# Allegro board DATAHSS.brd
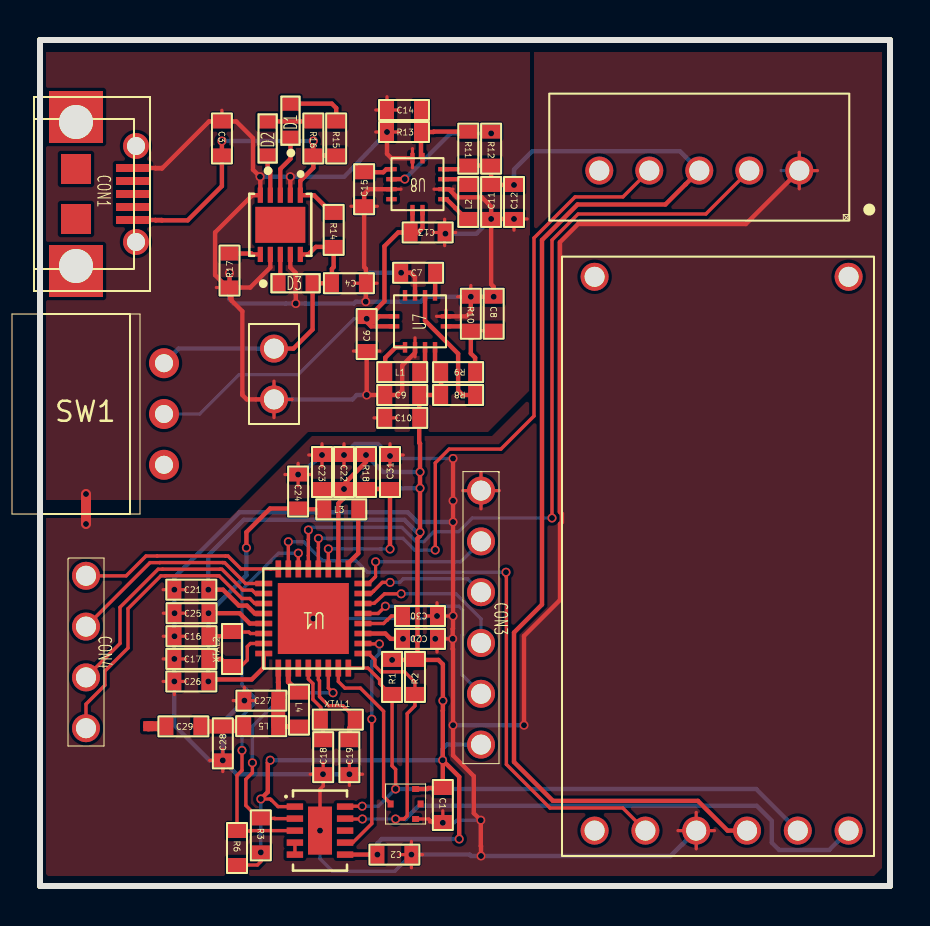
[diagram p0: board, top side]
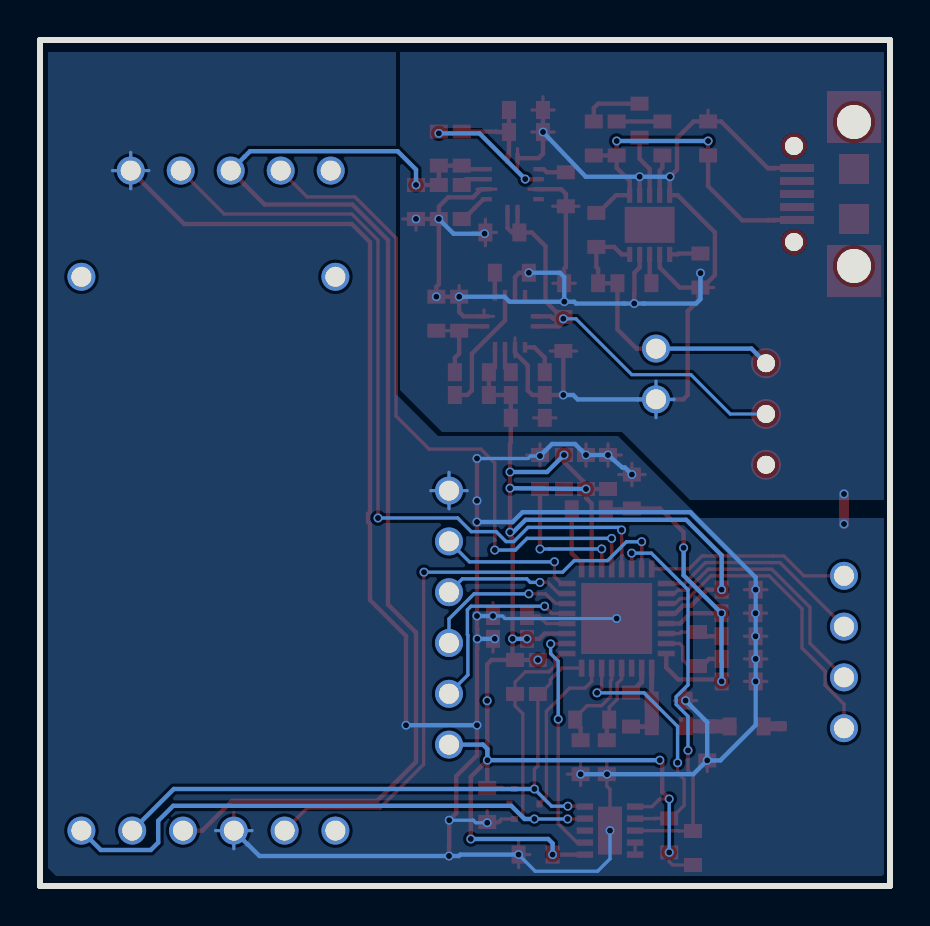
[diagram p1: board, bottom side, seen from below]

Outline 42.5 x 42.3 mm; copper layers: TOP, BOTTOM. Coordinates in mm from the lower left corner of the outline.
Outline path: 0.4,42.3 0,42.3 0,0 42.5,0 42.5,42.3 0.3,42.3

## Design rules (mm)
constraint set DEFAULT: min track width 0.16

## Placement (name value [footprint] x y rotation side)
A1  Antenna  [SN_SMD_ANTENNA_START_0D5]  5.41 7.99 0 top
C1  100nF  [SN_SMD_0603_C]  20.14 4.05 270 top
C2  4.7u  [SN_SMD_0603_C]  17.72 1.57 180 top
C3  0.1u  [SN_SMD_0603_C]  9.1 37.38 270 top
C4  0.1u  [SN_SMD_0603_C]  15.45 30.14 180 top
C6  10u  [SN_SMD_0603_C]  16.33 27.6 90 top
C7  1n  [SN_SMD_0603_C]  18.91 30.66 0 top
C8  10p  [SN_SMD_0603_C]  22.68 28.61 270 top
C9  10u  [SN_SMD_0603_C]  18.11 24.55 0 top
C10  10u  [SN_SMD_0603_C]  18.11 23.41 0 top
C11  10u  [SN_SMD_0603_C]  22.56 34.2 90 top
C12  10u  [SN_SMD_0603_C]  23.7 34.2 90 top
C13  10u  [SN_SMD_0603_C]  19.38 32.68 180 top
C14  10p  [SN_SMD_0603_C]  18.2 38.8 0 top
C15  1n  [SN_SMD_0603_C]  16.21 34.84 90 top
C16  12p  [SN_SMD_0603_C]  7.57 12.49 0 top
C17  12p  [SN_SMD_0603_C]  7.57 11.35 0 top
C18  12p  [SN_SMD_0603_C]  14.16 6.44 90 top
C19  12p  [SN_SMD_0603_C]  15.47 6.44 90 top
C20  1n  [SN_SMD_0603_C]  19 12.36 180 top
C21  1n  [SN_SMD_0603_C]  7.57 14.82 0 top
C22  1n  [SN_SMD_0603_C]  15.2 20.7 270 top
C23  1n  [SN_SMD_0603_C]  14.1 20.7 270 top
C24  10 u  [SN_SMD_0603_C]  12.91 19.72 270 top
C25  100n  [SN_SMD_0603_C]  7.58 13.64 0 top
C26  100n  [SN_SMD_0603_C]  7.57 10.23 0 top
C27  1.2p  [SN_SMD_0603_C]  11.07 9.27 0 top
C28  1.2p  [SN_SMD_0603_C]  9.14 7.13 90 top
C29  1n  [SN_SMD_0603_C]  7.17 7.98 0 top
C30  100n  [SN_SMD_0603_C]  19 13.5 180 top
C31  100n  [SN_SMD_0603_C]  17.5 20.7 90 top
CON1  USB_MICRO  [SN_PTH_ZX62D_B_5PA8]  1.8 34.6 270 top
CON2  CONNECTOR_2  [SN_PTH_CONNECTOR_2PIN_2D54MM]  11.7 25.6 90 top
CON3  CONNECTOR_6  [SN_SMD_CONNECTOR6_LINE_SQUARE1D0_PITCH2D0]  22.05 13.42 270 top
CON4  CONNECTOR_4  [SN_SMD_CONNECTOR4_LINE_SQUARE1D0_PITCH2D0]  2.3 11.7 270 top
D1  LED  [SN_SMD_0603_LED]  12.52 38.27 90 top
D2  LED  [SN_SMD_0603_LED]  11.38 37.38 90 top
D3  LED  [SN_SMD_0603_LED]  12.78 30.14 0 top
L1  1.5uH  [SN_SMD_0603_L]  18.11 25.69 0 top
L2  1.5uH  [SN_SMD_0603_L]  21.41 34.2 90 top
L3  10uH  [SN_SMD_0603_L]  15.06 18.84 0 top
L4  15nH  [SN_SMD_0603_L]  12.95 8.82 270 top
L5  2nH  [SN_SMD_0603_L]  11.06 7.99 180 top
R1  10k  [SN_SMD_0603_R]  17.6 10.45 90 top
R2  10k  [SN_SMD_0603_R]  18.75 10.45 90 top
R3  4.7 k  [SN_SMD_0603_R]  11.04 2.53 270 top
R6  4.7 k  [SN_SMD_0603_R]  9.85 1.9 270 top
R8  1M  [SN_SMD_0603_R]  20.91 24.55 180 top
R9  560k  [SN_SMD_0603_R]  20.91 25.69 180 top
R10  180k  [SN_SMD_0603_R]  21.54 28.61 270 top
R11  680k  [SN_SMD_0603_R]  21.41 36.87 270 top
R12  1M  [SN_SMD_0603_R]  22.56 36.87 270 top
R13  130k  [SN_SMD_0603_R]  18.2 37.7 0 top
R14  1.5k  [SN_SMD_0603_R]  14.68 32.8 270 top
R15  1.5k  [SN_SMD_0603_R]  14.81 37.38 270 top
R16  1.5k  [SN_SMD_0603_R]  13.67 37.38 270 top
R17  1.13k  [SN_SMD_0603_R]  9.48 30.77 90 top
R18  100k  [SN_SMD_0603_R]  16.3 20.7 270 top
SW1  SWITCH_ON_OFF_ON  [SN_PTH_SWITCH_SM0320102]  1.8 23.6 0 top
U1  CC2650_VQFN_32PIN  [SN_SMD_TI_CC2650_PVQFN_32PIN]  13.67 13.37 180 top
U3  CCS811  [SON60P270X400X110-11N]  14 2.77 0 top
U4  SM-PWM-01C  [A2512WV-5P_CONNECTOR]  40.46 33.82 90 top
U5  HTS221  [LGA6R75P3X2_200X200X90]  18.28 4.1 0 top
U6  -  [T6713]  41.7 1.5 90 top
U7  TPS63050  [RMW0012A]  19 28.23 90 top
U8  TPS63050  [RMW0012A]  18.87 35.09 180 top
U9  BQ24080  [LGA]  12.02 33.06 270 top
XTAL1  32.768k  [SN_SMD_0603_XTAL]  14.89 8.32 0 top
XTAL2  24MHz  [SN_SMD_0603_XTAL]  9.6 11.85 90 top

## Library data of the parts
A1 = Antenna
C1-C4 C6-C30 = C
C31 = Capacitor
CON1 = CONNECTOR_USB_MICRO
CON2 = CONNECTOR_2
CON3 = CONNECTOR_6
CON4 = CONNECTOR_4
D1-D3 = LED
L1-L5 = L
R1-R3 R6 R8-R17 = R
R18 = Resistor
SW1 = SWITCH_ON_OFF_ON
U1 = CC2650_VQFN_32PIN
U3 = CCS811
U4 = SM-PWM-01C
U5 = HTS221
U6 = T6713_CO2
U7 U8 = TPS6305
U9 = BQ24080
XTAL1 XTAL2 = Crystal

## Footprints (pads in the part's own frame, mm; a bottom-side part is the same pattern mirrored in y, then rotated)
A2512WV-5P_CONNECTOR
  round 1.4 hole 1: 1(1.95,2.5) 2(1.95,5) 3(1.95,7.5) 4(1.95,10) 5(1.95,12.5)
LGA
  rect 1.8x2.5 smd: (0,0)
  rect 0.76x0.26 smd: 1(-1.48,1) 2(-1.48,0.5) 3(-1.48,0) 4(-1.48,-0.5) 5(-1.48,-1) 6(1.48,-1) 7(1.48,-0.5) 8(1.48,0) 9(1.48,0.5) 10(1.48,1)
LGA6R75P3X2_200X200X90
  rect 0.35x0.3 smd: 1(0.5,0.75) 2(-0.5,0.75) 4(-0.5,-0.75) 5(0.5,-0.75)
  rect 0.3x0.35 smd: 3(-0.75,0) 6(0.75,0)
RMW0012A
  rect 0.53x0.22 smd: 1(-1.3,0.75) 2(-1.3,0.25) 3(-1.3,-0.25) 4(-1.3,-0.75) 7(1.3,-0.75) 8(1.3,-0.25) 9(1.3,0.25) 10(1.3,0.75)
  rect 0.22x0.53 smd: 5(-0.25,-1.3) 6(0.25,-1.3) 11(0.25,1.3) 12(-0.25,1.3)
SN_PTH_CONNECTOR_2PIN_2D54MM
  round 1.4 hole 1: 1(1.27,0) 2(-1.27,0)
SN_PTH_SWITCH_SM0320102
  round 1.5 hole 0.9: 1(4.4,2.54) 2(4.4,0) 3(4.4,-2.54)
SN_PTH_ZX62D_B_5PA8
  rect 2.6x2.7 hole 1.7: (-3.6,0) (3.6,0)
  round 1.3 hole 0.9: (-2.4,3) (2.4,3)
  rect 1.5x1.5 smd: (-1.25,0) (1.25,0)
  rect 0.4x1.7 smd: 1(1.3,2.85) 2(0.65,2.85) 3(0,2.85) 4(-0.65,2.85) 5(-1.3,2.85)
SN_SMD_0603_C
  rect 0.7x0.9 smd: 1(-0.85,0) 2(0.85,0)
SN_SMD_0603_L
  rect 0.7x0.9 smd: 1(-0.85,0) 2(0.85,0)
SN_SMD_0603_LED
  rect 0.7x0.9 smd: 1(-0.85,0) 2(0.85,0)
SN_SMD_0603_R
  rect 0.7x0.9 smd: 1(-0.85,0) 2(0.85,0)
SN_SMD_0603_XTAL
  rect 0.7x0.9 smd: 1(-0.85,0) 2(0.85,0)
SN_SMD_ANTENNA_START_0D5
  rect 0.5x0.5 smd: 1(0,0)
SN_SMD_CONNECTOR4_LINE_SQUARE1D0_PITCH2D0
  round 1.4 hole 1: 1(-3.81,0) 2(-1.27,0) 3(1.27,0) 4(3.81,0)
SN_SMD_CONNECTOR6_LINE_SQUARE1D0_PITCH2D0
  round 1.4 hole 1: 1(-6.35,0) 2(-3.81,0) 3(-1.27,0) 4(1.27,0) 5(3.81,0) 6(6.35,0)
SN_SMD_TI_CC2650_PVQFN_32PIN
  rect 0.28x0.85 smd: 1(1.75,2.48) 2(1.25,2.48) 3(0.75,2.48) 4(0.25,2.48) 5(-0.25,2.48) 6(-0.75,2.48) 7(-1.25,2.48) 8(-1.75,2.48) 17(-1.75,-2.48) 18(-1.25,-2.48) 19(-0.75,-2.48) 20(-0.25,-2.48) 21(0.25,-2.48) 22(0.75,-2.48) 23(1.25,-2.48) 24(1.75,-2.48)
  rect 0.85x0.28 smd: 9(-2.48,1.75) 10(-2.48,1.25) 11(-2.48,0.75) 12(-2.48,0.25) 13(-2.48,-0.25) 14(-2.48,-0.75) 15(-2.48,-1.25) 16(-2.48,-1.75) 25(2.48,-1.75) 26(2.48,-1.25) 27(2.48,-0.75) 28(2.48,-0.25) 29(2.48,0.25) 30(2.48,0.75) 31(2.48,1.25) 32(2.48,1.75)
  rect 3.55x3.55 smd: 33(0,0)
SON60P270X400X110-11N
  rect 0.82x0.32 smd: 1(-1.255,1.2) 2(-1.255,0.6) 3(-1.255,0) 4(-1.255,-0.6) 5(-1.255,-1.2) 6(1.255,-1.2) 7(1.255,-0.6) 8(1.255,0) 9(1.255,0.6) 10(1.255,1.2)
  rect 1.2x2.4 smd: 11(0,0)
T6713
  round 1.4 hole 1: (28.96,13.97) (28.96,1.27) 1(1.27,1.27) 2(1.27,3.81) 3(1.27,6.35) 4(1.27,8.89) 5(1.27,11.43) 6(1.27,13.97)

## Nets
3V3: C1.1 C2.2 C9.2 C10.2 C20.2 C21.2 C22.2 C23.2 CON3.6 R1.2 R2.2 R3.2 R6.2 R8.2 R9.2 R18.1 U1.11 U1.18 U1.28 U3.1 U3.6(VDD) U5.1(VDD) U7.4
5V: C11.2 C12.2 R11.2 R12.2 U4.3 U6.3 U8.4
GND: C1.2 C2.1 C3.1 C4.1 C6.1 C7.1 C8.1 C9.1 C10.1 C11.1 C12.1 C13.1 C14.1 C15.1 C16.1 C17.1 C18.1 C19.1 C20.1 C21.1 C22.1 C23.1 C24.1 C25.1 C26.1 C27.1 C28.1 C30.1 C31.2(B) CON1.5 CON2.2(C2) CON3.1 R10.1 R13.1 R17.1 U1.33 U3.11 U4.1 U5.5 U6.4 U7.2 U7.6 U7.9 U8.2 U8.6 U8.9 U9.2 U9.5(VSS) U9.7 U9.9
VDDR: C24.2 C25.2 C26.2 L3.1 U1.29 U1.32
DCDC_SW: L3.2 U1.17
GPIO1: CON4.1 U1.24
GPIO2: CON4.2 U1.25
GPIO3: CON4.3 U1.26
GPIO4: CON4.4(C4) U1.27
JTAG_TCKC: CON3.4(C4) U1.14
JTAG_TDI: CON3.2 U1.16
JTAG_TDO: CON3.3 U1.15
JTAG_TMSC: CON3.5 U1.13
X24M1: C16.2 U1.30 XTAL2.2(B)
X24M2: C17.2 U1.31 XTAL2.1
X32K1: C18.2 U1.4 XTAL1.1
X32K2: C19.2 U1.5(X32K_Q2) XTAL1.2(B)
N06949: U3.4 U3.5
N21411: C4.2 CON2.1 D3.2 R14.2 SW1.1 U9.10
N21493: C6.2 C13.2 SW1.2 U7.11 U7.12(VIN) U8.11 U8.12(VIN)
N21539: C3.2 CON1.1(VCC) R14.1 R15.2 R16.2 U9.1
N24242: C8.2 R9.1 R10.2 U7.5
N24253: R8.1 U7.8
N27131: C14.2 R11.1 R13.2 U8.5
N27135: R12.1 U8.8
N34860: D2.2 R16.1
N34937: D3.1(CATHODE) U9.8
N42731: L4.1 U1.2
N42914: C28.2 C29.2 L5.2
N43047: C27.2 L4.2 L5.1 U1.1
N43158: A1.1(A) C29.1
N43254: C30.2 U1.12
N44652: C31.1 R18.2(B) U1.19
N53489: R1.1 U1.8 U3.10 U5.2 U6.2
N53518: R2.1 U1.9 U3.9 U5.4 U6.1(TX / SDA)
N53557: R3.1 U1.6 U3.2
N53567: U1.10 U3.7
N53577: R6.1 U1.22 U3.3
N53587: U1.20 U4.4
N53591: U1.21 U4.2
N53595: U1.7 U5.3
N54520: U1.23 U6.5
N510470: D1.2 R15.1
N510471: D1.1(CATHODE) U9.3
N511351: C15.2 U8.7
N512916: L2.1 U8.1
N512917: L2.2 U8.3
N514110: L1.1 U7.1
N514111: L1.2 U7.3
N514515: C7.2 U7.7
N515076: D2.1(CATHODE) U9.4
N515079: R17.2 U9.6

Pads without a net: CON1 2 3 4; SW1 3; U1 3; U3 8; U4 5; U5 6; U6 6; U7 10; U8 10

## Via types
v1: diameter 0.45, hole 0.3, TOP to BOTTOM, 90 vias

## Routing (per net, layer and track width the routed paths; a pad name or vN(x,y) marks a point on that pad's centre or on a via; arc(x,y) is an arc through that point)
3V3: length 91.1
  TOP w0.17: C10.2 18.96,23.41 ; v1(11.04,4.35) 11.51,4.35 11.57,4.29 11.58,4.29 11.9,3.97 U3.1 ; R2.2 18.75,11.3 ; R6.2 10.87,1.05 11.04,1.22 v1(11.04,1.68) ; R1.2 v1(17.6,11.3)
  TOP w0.22: U1.18 14.92,19.12 15.19,19.4 v1(15.2,19.85) ; 20.14,6.28 20.96,5.46 v1(20.96,2.35) ; 20.14,6.28 C1.1 19.42,4.9 19.37,4.85 U5.1 ; 20.14,6.28 20.14,8.76 20.14,8.77 v1(20.14,9.26) 20.14,11.08 19.92,11.3 18.75,11.3 ; 20.14,6.28 v1(20.13,6.29) ; v1(11.51,6.29) 11.39,6.17 11.39,4.7 v1(11.04,4.35) ; v1(8.42,14.82) 9.15,14.82 9.94,14.02 10.34,14.02 10.74,13.62 U1.28 ; v1(15.2,19.85) 15.2,20.1 16.3,21.2 v1(16.3,21.55) ; v1(15.2,19.85) C23.2 ; v1(18.15,12.36) 17.53,12.36 17.27,12.62 U1.11 ; v1(17.6,11.3) 18.75,11.3 ; 18.75,11.3 18.87,11.43 v1(18.87,12.36) 18.87,17.37 19,17.5 v1(19,17.69) v1(19,19.89) 19,22.12 18.96,22.16 C9.2 R8.2 R9.2 19.97,25.69 19.75,25.91 U7.4 ; v1(16.87,1.57) 15.26,1.57
  BOTTOM w0.17: v1(11.04,1.68) v1(11.04,4.35)
  BOTTOM w0.22: v1(19,17.69) 18.84,17.69 18.22,18.31 10.19,18.31 8.42,16.54 v1(8.42,14.82) ; v1(15.2,19.85) v1(19,19.89) ; v1(16.87,1.57) 16.87,2.13 17.09,2.35 v1(20.96,2.35) ; v1(11.51,6.29) v1(20.13,6.29) 20.13,6.85 20.35,7.07 CON3.6 ; v1(19,20.7) 17.15,20.7 v1(16.3,21.55) ; v1(18.15,12.36) v1(18.87,12.36)
5V: length 64.4
  TOP w0.17: U8.4 20.17,35.84
  TOP w0.22: U4.3 32.28,35.09 31.27,34.08 26.88,34.08 25.1,32.3 25.1,14.07 23.7,12.67 23.7,6.2 25.65,4.25 32.89,4.25 34.38,2.77 U6.3 ; 20.17,35.84 21.24,35.84 R11.2 R12.2 C11.2 v1(23.7,35.05)
  BOTTOM w0.22: v1(23.7,35.05) 23.7,35.82 24.62,36.74 31.99,36.74 32.28,36.46 U4.3
GND: length 311.1
  TOP w0.16: 18.62,36.87 U8.6 18.62,35.91 ; 9.1,38.79 C3.1 9.76,38.23 ; v1(12.91,20.57) 13.57,20.57 ; v1(12.91,20.57) 12.91,20.01 ; v1(12.91,20.57) 12.24,20.57 ; v1(12.91,20.57) 12.91,21.14 ; 15.67,26.75 C6.1 17,26.75 ; 19.82,28.48 U7.6 ; U7.6 20.3,28.8 ; U7.6 20.78,28.48 ; 6.16,14.82 v1(6.72,14.82) 7.28,14.82 ; 8.82,29.92 9.48,29.92 ; 9.48,29.92 10.14,29.92 ; 9.48,29.92 9.48,29.36 ; CON3.1 22.96,19.77 ; CON3.1 22.05,20.68 ; CON3.1 21.14,19.77 ; CON3.1 22.05,18.86 ; U4.1 38.88,35.77 ; U4.1 37.96,34.86 ; U4.1 37.96,36.68 ; 9.66,9.27 v1(10.22,9.27) ; v1(10.22,9.27) 10.22,9.93 ; v1(10.22,9.27) 10.78,9.27 ; CON2.2 11.7,25.24 ; CON2.2 11.7,23.42 ; CON2.2 12.61,24.33 ; 21.54,30.03 v1(21.54,29.46) 20.88,29.46 ; 23.7,32.79 v1(23.7,33.35) 24.36,33.35 ; 31.9,2.77 U6.4 ; U6.4 32.81,3.68 ; U6.4 33.72,2.77 ; U6.4 32.81,1.86 ; 18.01,1.57 v1(18.57,1.57) ; v1(18.57,1.57) 18.57,0.91 ; v1(18.57,1.57) 18.57,2.23 ; v1(18.57,1.57) 19.13,1.57 ; 6.72,9.57 v1(6.72,10.23) ; v1(6.72,10.23) 6.16,10.23 ; v1(6.72,10.23) 7.28,10.23 ; 16.79,38.8 C14.1 ; C14.1 17.35,39.46 ; C14.1 17.91,38.8 ; 8.48,6.28 v1(9.14,6.28) ; v1(9.14,6.28) 9.14,6.84 ; v1(9.14,6.28) 9.14,5.72 ; 19.29,13.5 C30.1 ; C30.1 19.85,14.16 ; C30.1 20.41,13.5 ; 20.65,34.84 U8.2 19.7,34.84 ; 15.47,5.03 v1(15.47,5.59) ; v1(15.47,5.59) 16.13,5.59 ; v1(15.47,5.59) 15.47,6.15 ; 18.75,26.46 U7.2 18.75,27.41 ; C4.1 16.29,30.8 ; C4.1 15.73,30.14 ; C4.1 16.29,30.14 ; C4.1 16.86,30.14 ; 12.52,31.58 U9.9 ; 6.16,11.35 v1(6.72,11.35) 7.28,11.35 ; 17.5,20.99 C31.2 ; C31.2 18.16,21.55 ; C31.2 17.5,22.11 ; 14.16,6.15 C18.1 13.5,5.59 ; 17.91,37.7 v1(17.35,37.7) 16.79,37.7 ; 19.67,32.68 C13.1 ; C13.1 20.23,32.02 ; C13.1 20.79,32.68 ; C13.1 20.23,33.34 ; 19.48,3.2 C1.2 20.14,3.76 ; 6.17,13.64 v1(6.73,13.64) 7.29,13.64 ; 16.7,23.41 C10.1 17.82,23.41 ; 19.85,11.7 C20.1 20.41,12.36 ; 15.55,33.99 C15.1 16.87,33.99 ; 14.1,20.99 v1(14.1,21.55) ; v1(14.1,21.55) 14.1,22.11 ; v1(14.1,21.55) 13.44,21.55 ; 7.28,12.49 v1(6.72,12.49) 6.16,12.49 ; 15.2,20.99 v1(15.2,21.55) 15.2,22.11 ; 11.52,31.58 U9.7 ; 18.05,34.84 U8.9 17.1,34.84
  TOP w0.17: 20.3,28.48 U7.6 ; v1(20.14,3.16) 19.63,3.16 19.44,3.35 U5.5 ; v1(14,2.77) 14,4.83 14.16,4.99 C18.1 ; 20.17,34.84 U8.2 ; C3.1 9,38.23 ; 17.57,34.84 U8.9
  TOP w0.22: C6.1 v1(16.33,24.55) C9.1 17.88,24.55 18.11,24.78 18.11,26.03 18.75,26.66 U7.2 ; v1(16.29,29.22) 16.29,29.22 C4.1 ; U4.1 35.29,33.1 26.91,33.1 26,32.19 26,18.7 26.1,18.61 26.1,18.19 26,18.1 26,14.3 24.2,12.5 v1(24.2,8.04) ; 6.1,35.88 5.79,35.88 5.77,35.9 ; 6.1,35.88 6.09,35.9 5.77,35.9 ; 6.1,35.88 8.45,38.23 9.82,38.23 10.65,37.39 10.65,35.81 v1(11,35.46) 11.02,35.45 U9.5 10.62,34.54 8.76,32.68 8.76,30.54 9.38,29.92 9.48,29.92 ; 5.77,35.9 CON1.5 ; v1(9.48,30.65) 9.48,29.92 ; 9.48,29.92 9.58,29.92 ; U9.2 v1(12.52,35.46) ; v1(22.05,1.5) 22.05,2 22.04,2 v1(22.04,3.29) 21.69,3.64 21.69,5.49 20.65,6.53 v1(20.65,8.04) 20.65,11.85 20.64,11.86 v1(20.64,12.36) 20.64,12.85 20.65,12.87 v1(20.65,13.5) v1(20.65,18.2) v1(20.65,19.26) v1(20.65,21.38) ; 9.58,29.92 9.58,29.28 10.12,28.73 10.12,24.55 10.34,24.33 CON2.2 ; 9.58,29.92 10.51,29.92 11.52,30.93 11.52,31.58 ; 17.57,34.84 16.44,34.84 16.21,34.61 C15.1 16.21,30.95 16.29,30.86 16.29,30.14 ; U8.6 17.57,36.39 17.35,36.61 v1(17.35,37.7) C14.1 ; 20.3,28.48 21.32,28.48 21.54,28.7 v1(21.54,29.46) v1(22.68,29.46) 22.68,29.96 22.56,30.09 v1(22.56,33.35) ; U7.9 18.75,30.44 18.53,30.66 v1(18.06,30.66) ; 12.52,31.58 12.52,30.93 12.78,30.67 12.78,29.63 12.79,29.62 v1(12.79,29.12) ; 20.17,34.84 20.44,34.84 20.85,34.43 22.1,34.43 22.56,33.97 v1(22.56,33.35) ; v1(22.56,33.35) v1(23.7,33.35)
  TOP w0.5: v1(2.3,19.6) v1(2.3,18.1)
  BOTTOM w0.16: 10.79,24.33 CON2.2 ; CON2.2 11.7,25.24 ; CON2.2 11.7,23.42 ; v1(19.85,13.5) 19.39,13.5 19.26,13.37 v1(13.67,13.37) ; 32.81,1.86 U6.4 ; U6.4 33.72,2.77 ; U6.4 31.9,2.77 ; CON3.1 22.96,19.77 ; CON3.1 21.14,19.77 ; CON3.1 22.05,18.86 ; CON3.1 22.05,20.68 ; U4.1 38.88,35.77 ; U4.1 37.96,34.86 ; U4.1 37.05,35.77 ; U4.1 37.96,36.68
  BOTTOM w0.17: v1(20.65,21.38) 18.1,21.38 17.97,21.5 v1(17.5,21.5) ; v1(22.04,3.29) 20.84,3.29 20.71,3.16 v1(20.14,3.16) ; v1(14,2.77) 14,1.36 14.62,0.74 17.74,0.74 v1(18.57,1.57)
  BOTTOM w0.22: v1(21.54,29.46) 19.28,29.46 19.03,29.22 v1(16.29,29.22) ; v1(9.48,30.65) 9.48,29.34 9.7,29.12 12.29,29.12 12.29,29.12 v1(12.79,29.12) 13.29,29.12 13.29,29.12 15.7,29.12 15.79,29.22 v1(16.29,29.22) ; U6.4 32.12,2.08 32.11,2.08 31.53,1.5 v1(22.05,1.5) 21.55,1.5 21.48,1.57 v1(18.57,1.57) ; v1(20.65,8.04) v1(24.2,8.04) ; v1(16.33,24.55) 15.84,24.55 15.62,24.33 CON2.2 ; v1(19.85,13.5) v1(20.65,13.5) ; v1(9.14,6.28) 9.83,5.59 v1(14.15,5.59) v1(15.47,5.59) ; v1(9.14,6.28) 9.14,8.19 v1(10.22,9.27) ; v1(9.14,6.28) 8.48,6.28 6.72,8.04 v1(6.72,10.23) v1(6.72,11.35) v1(6.72,14.82) 6.72,15.43 9.98,18.69 18.38,18.69 18.87,18.2 v1(20.65,18.2) ; v1(17.35,37.7) 15.21,35.46 v1(12.52,35.46) v1(11,35.46) ; v1(12.91,20.57) 13.26,20.92 13.38,20.92 v1(14.1,21.55) v1(15.2,21.55) 15.75,22.1 16.9,22.1 v1(17.5,21.5) ; v1(16.29,29.22) 16.29,30.44 16.51,30.66 v1(18.06,30.66) ; v1(20.64,12.36) v1(19.76,12.36) ; v1(20.27,32.62) 21.82,32.62 v1(22.56,33.35)
VDDR: length 19.4
  TOP w0.17: U1.32 11.19,11.62
  TOP w0.22: v1(8.42,10.23) 8.52,10.33 10.59,10.33 11.19,10.93 11.19,11.62 ; U1.29 10.49,13.12 9.98,13.64 v1(8.43,13.64) ; L3.1 12.94,18.84 C24.2 11.5,18.87 10.32,17.69 v1(10.32,16.91)
  BOTTOM w0.22: v1(10.32,16.91) 10.32,15.53 v1(8.43,13.64) 8.43,11.23 8.42,11.22 v1(8.42,10.23)
DCDC_SW: length 3.2
  TOP w0.17: U1.17 15.42,15.85
  TOP w0.22: L3.2 15.91,16.64 15.42,16.14 15.42,15.85
GPIO1: length 10.3
  TOP w0.17: CON4.1 4.31,15.51 5.3,16.5 5.85,16.5 5.86,16.5 9.28,16.5 9.28,16.5 9.4,16.5 10.05,15.85 11.53,15.85 U1.24
GPIO2: length 10.6
  TOP w0.17: CON4.2 5.5,16.17 5.99,16.17 5.99,16.17 9.14,16.17 9.14,16.17 9.23,16.17 10.28,15.12 U1.25
GPIO3: length 12.7
  TOP w0.17: CON4.3 4,12.13 4,13.93 5.91,15.84 6.13,15.84 9.09,15.84 10.14,14.79 10.61,14.79 10.8,14.6 11.13,14.6 11.15,14.62 U1.26
GPIO4: length 14.9
  TOP w0.17: U1.27 10.74,14.12 10.49,14.38 10.09,14.38 8.96,15.51 8.87,15.51 8.87,15.51 6.27,15.51 6.26,15.51 6.04,15.51 4.4,13.87 4.4,11.9 3.24,10.74 3.24,10.04 2.3,9.09 CON4.4
JTAG_TCKC: length 7.8
  TOP w0.17: v1(18.06,14.61) 17.23,14.61 16.71,14.13 16.16,14.13 U1.14
  BOTTOM w0.17: CON3.4 22.05,13.35 20.79,14.61 v1(18.06,14.61)
JTAG_TDI: length 7.2
  TOP w0.16: v1(16.78,16.21) 16.78,15.47 16.75,15.44
  TOP w0.17: U1.16 16.43,15.12 16.75,15.44
  BOTTOM w0.17: CON3.2 21.03,16.21 v1(16.78,16.21)
JTAG_TDO: length 6.5
  TOP w0.17: v1(17.51,15.18) 17.12,15.18 16.67,14.74 16.67,14.74 16.56,14.62 U1.15
  BOTTOM w0.17: v1(17.51,15.18) 17.98,15.18 18.16,15.36 21.38,15.36 CON3.3
JTAG_TMSC: length 9.8
  TOP w0.17: v1(17.27,13.99) 16.9,13.62 U1.13
  BOTTOM w0.17: v1(17.27,13.99) 20.95,13.99 21.13,13.81 21.13,12.57 21.11,12.54 21.11,10.55 CON3.5
X24M1: length 2.9
  TOP w0.17: U1.30 11.19,12.62 10.52,12.62 10.44,12.7 9.6,12.7
  TOP w0.22: C16.2 9.39,12.49 9.6,12.7 XTAL2.2
X24M2: length 3.8
  TOP w0.17: 9.6,11.04 10.11,11.04 10.37,11.3 10.37,11.97 10.52,12.12 11.19,12.12 U1.31
  TOP w0.22: C17.2 9.05,11.35 9.36,11.04 9.6,11.04 XTAL2.1
X32K1: length 3.9
  TOP w0.17: XTAL1.1 14.04,8.93 13.65,9.33 13.65,10.12 13.42,10.35 U1.4
  TOP w0.22: C18.2 14.16,8 14.06,8.1 14.06,8.3 XTAL1.1
X32K2: length 4.9
  TOP w0.17: XTAL1.2 15.74,8.42 15.15,9.01 14.42,9.01 13.98,9.46 13.98,10.26 13.92,10.32 U1.5
  TOP w0.22: C19.2 15.47,7.91 15.76,8.2 15.76,8.3 XTAL1.2
N06949: length 0.6
  TOP w0.17: U3.4 U3.5
N21411: length 15.1
  TOP w0.16: U9.10 13.02,31.58
  TOP w0.22: CON2.1 12.67,26.87 13.63,27.83 D3.2 C4.2 14.6,30.86 14.68,30.95 14.68,31.96 13.79,31.96 13.42,31.58 13.02,31.58
  BOTTOM w0.22: SW1.1 6.93,26.87 CON2.1
N21493: length 23.5
  TOP w0.16: U7.11 17.7,28.48
  TOP w0.22: U8.11 18.62,32.77 C13.2 ; v1(16.33,28.36) C6.2 16.43,28.45 17.22,29.24 17.22,31.99 17.91,32.68 C13.2 ; v1(16.33,28.36) 16.33,28.2 16.55,27.98 U7.12 ; v1(16.33,28.36) 16.83,28.36 16.95,28.48 17.7,28.48 ; C13.2 18.9,32.68 19.12,32.9 U8.12
  BOTTOM w0.16: v1(16.33,28.36) 15.7,28.36 12.91,25.57 9.95,25.57 7.99,23.6 SW1.2
N21539: length 18.5
  TOP w0.16: R14.1 14.68,33.65
  TOP w0.22: v1(13.67,37.25) R16.2 ; R16.2 13.67,35.91 13.02,35.26 U9.1 13.7,34.54 14.58,33.65 14.68,33.65 ; R16.2 R15.2 ; CON1.1 5.77,33.3 ; 5.77,33.3 6.09,33.3 6.1,33.28 ; 5.77,33.3 5.79,33.28 6.1,33.28 ; 6.1,33.28 7.38,33.28 9.1,35 C3.2 v1(9.1,37.25)
  BOTTOM w0.22: v1(9.1,37.25) v1(13.67,37.25)
N24242: length 4.6
  TOP w0.17: C8.2 R10.2
  TOP w0.22: R9.1 21.76,26.41 21.54,26.63 R10.2 21.32,27.98 U7.5
N24253: length 6.4
  TOP w0.16: 19.25,29.53 U7.8
  TOP w0.22: 19.25,29.53 19.25,28.27 20.91,26.62 20.91,24.78 21.14,24.55 R8.1
N27131: length 4.8
  TOP w0.22: R13.2 19.67,37.7 19.69,37.72 R11.1 ; R13.2 C14.2 ; R13.2 19.05,36.47 U8.5
N27135: length 5.9
  TOP w0.22: v1(18.24,35.34) 17.58,35.34 U8.8
  BOTTOM w0.22: v1(22.56,37.63) 20.53,37.63 v1(18.24,35.34)
N34860: length 2.3
  TOP w0.16: 13.67,38.23 R16.1 ; D2.2 11.38,38.23
  TOP w0.22: 11.38,38.23 13.67,38.23
N34937: length 1.5
  TOP w0.16: 12.02,31.58 U9.8
  TOP w0.22: 12.02,31.58 12.02,30.23 D3.1
N42731: length 1.4
  TOP w0.25: U1.2 12.42,10.2 L4.1
N42914: length 2.2
  TOP w0.7: L5.2 9.15,7.99 C28.2 C29.2
N43047: length 4
  TOP w0.25: U1.1 11.92,10.18 11.92,10.18 C27.2 ; L4.2 11.93,7.97 L5.1
  TOP w0.7: C27.2 11.91,9.26 L5.1
N43158: length 0.9
  TOP w0.5: C29.1 6.31,7.99 A1.1 5.42,7.98
N43254: length 2.2
  TOP w0.17: U1.12 17.18,13.12 17.35,13.29 17.36,13.29 17.57,13.5 C30.2
N44652: length 8.3
  TOP w0.17: U1.19 v1(14.42,16.85)
  TOP w0.22: R18.2 C31.1 v1(17.5,16.85)
  BOTTOM w0.17: v1(14.42,16.85) 17.03,16.85 17.03,16.85 v1(17.5,16.85)
N53489: length 31.5
  TOP w0.17: v1(16.11,3.99) 15.28,3.99 15.26,3.97 ; v1(17.78,4.85) 17.78,5.83 17.6,6.01 R1.1 17.5,9.6 16.98,10.13 16.98,10.31 16.4,10.89 U1.8
  BOTTOM w0.17: v1(16.11,3.99) 16.92,3.99 v1(17.78,4.85)
  BOTTOM w0.22: U6.2 35.81,4.85 v1(17.78,4.85)
N53518: length 38.3
  TOP w0.16: R2.1 18.75,10.19 18.23,10.71
  TOP w0.17: v1(17.78,3.35) 18.2,3.35 18.36,3.51 18.36,8.62 18.75,9.01 R2.1 ; v1(16.12,3.35) 15.28,3.35 15.26,3.37 ; U1.9 16.43,11.62 16.75,11.31 16.75,11.02 17.05,10.71 18.23,10.71
  BOTTOM w0.17: v1(17.78,3.35) v1(16.12,3.35)
  BOTTOM w0.22: v1(17.78,3.35) 18.28,3.35 18.94,4.01 35.84,4.01 36.59,3.26 36.59,2.17 36.96,1.8 39.46,1.8 U6.1
N53557: length 12.9
  TOP w0.17: v1(10.62,6.16) 10.62,5.66 10.29,5.33 10.29,4.03 10.94,3.38 R3.1 11.74,3.38 11.75,3.37 U3.2 ; v1(14.65,9.66) 14.42,9.89 U1.6
  BOTTOM w0.17: v1(14.65,9.66) 12.3,9.66 10.62,7.98 v1(10.62,6.16)
N53567: length 11.7
  TOP w0.17: v1(16.97,12.1) 16.17,12.1 U1.10 ; 15.26,2.17 15.64,2.17 16.59,3.12 v1(16.59,8.34)
  BOTTOM w0.17: v1(16.97,12.1) 16.97,11.62 16.59,11.24 v1(16.59,8.34)
N53577: length 19.9
  TOP w0.17: U3.3 10.57,2.77 10.54,2.75 R6.1 9.85,5.53 10.1,5.78 v1(10.1,6.78) ; U1.22 v1(12.92,16.64)
  BOTTOM w0.17: v1(10.1,6.78) 10.1,8.49 10.69,9.08 10.69,9.46 10.1,10.05 10.1,14.81 11.93,16.64 v1(12.92,16.64)
N53587: length 33.9
  TOP w0.17: U1.20 13.92,16.52 13.92,16.91 13.92,16.91 v1(13.92,17.38) ; U4.4 29.15,34.46 26.76,34.46 24.7,32.4 24.7,23.5 23.04,21.85 20.46,21.85 19.76,21.15 v1(19.76,16.8)
  BOTTOM w0.17: v1(13.92,17.38) 18.15,17.38 18.73,16.8 v1(19.76,16.8)
N53591: length 40.2
  TOP w0.17: U4.2 33.29,33.6 26.9,33.6 25.6,32.3 v1(25.6,18.4) ; v1(13.42,17.8) 13.42,17.33 13.42,17.33 13.42,16.52 13.42,16.52 U1.21
  BOTTOM w0.17: v1(25.6,18.4) 21.62,18.4 20.94,17.72 19.69,17.72 19.2,17.22 18.81,17.22 18.1,17.93 13.55,17.93 v1(13.42,17.8)
N53595: length 8.3
  TOP w0.17: U1.7 14.92,10.22 15.25,9.89 16.02,9.89 17.18,8.74 17.18,4.47 17.53,4.12 U5.3
N54520: length 30.8
  TOP w0.17: v1(23.3,15.69) 23.3,15.49 23.32,15.47 23.32,6.08 25.5,3.9 29.14,3.9 U6.5 ; U1.23 v1(12.42,17.21)
  BOTTOM w0.17: v1(23.3,15.69) 16.37,15.69 15.79,16.27 14.12,16.27 13.18,17.21 v1(12.42,17.21)
N510470: length 3
  TOP w0.22: 14.81,38.23 R15.1 14.81,38.9 14.59,39.12 D1.2
N510471: length 3.1
  TOP w0.22: D1.1 12.52,36.36 12.02,35.85 U9.3
N511351: length 1.4
  TOP w0.17: C15.2 16.21,35.69 ; 17.57,35.84 U8.7
  TOP w0.22: 17.57,35.84 17.32,35.84 17.16,35.69 16.21,35.69
N512916: length 1.7
  TOP w0.17: 21.31,33.35 L2.1
  TOP w0.22: U8.1 20.33,34.34 20.77,33.9 20.77,33.89 21.31,33.35
N512917: length 1.4
  TOP w0.22: L2.2 21.41,35.12 21.19,35.34 U8.3
N514110: length 1.9
  TOP w0.16: 18.25,26.93 U7.1
  TOP w0.22: 18.25,26.93 17.78,26.93 17.26,26.41 L1.1
N514111: length 1.4
  TOP w0.16: U7.3 19.25,26.93
  TOP w0.22: L1.2 19.03,25.69 19.25,25.91 19.25,26.93
N514515: length 1.2
  TOP w0.22: 19.72,29.56 U7.7 19.76,29.54 C7.2
N515076: length 2
  TOP w0.22: U9.4 11.52,35.77 11.38,35.91 D2.1
N515079: length 1.6
  TOP w0.16: R17.2 9.48,31.62 ; 11.02,31.58 U9.6
  TOP w0.22: 9.48,31.62 10.57,31.62 10.62,31.58 11.02,31.58

## Copper pours and planes (outline as drawn; the poured copper is in the pictures)
GND on TOP, BOTTOM: 0.3,19.3 10,19.3 13.4,22.7 22.4,22.7 24.5,24.8 24.5,41.7 0.3,41.7
GND on TOP, BOTTOM: 0.3,18.4 9.5,18.4 13.6,22.5 22.6,22.5 24.7,24.6 24.7,41.7 42.1,41.7 42.1,0.9 41.7,0.5 0.4,0.5 0.3,0.6
